# Altium PCB PCB1.PcbDoc
Units mil, origin at the board's own origin, x right, y up, seen from the top; angles counter-clockwise.
Board outline 3225 x 4005 mil, 2 copper layers (Top Layer, Bottom Layer); 19 components, 28 nets, 145 pads, 2 vias.
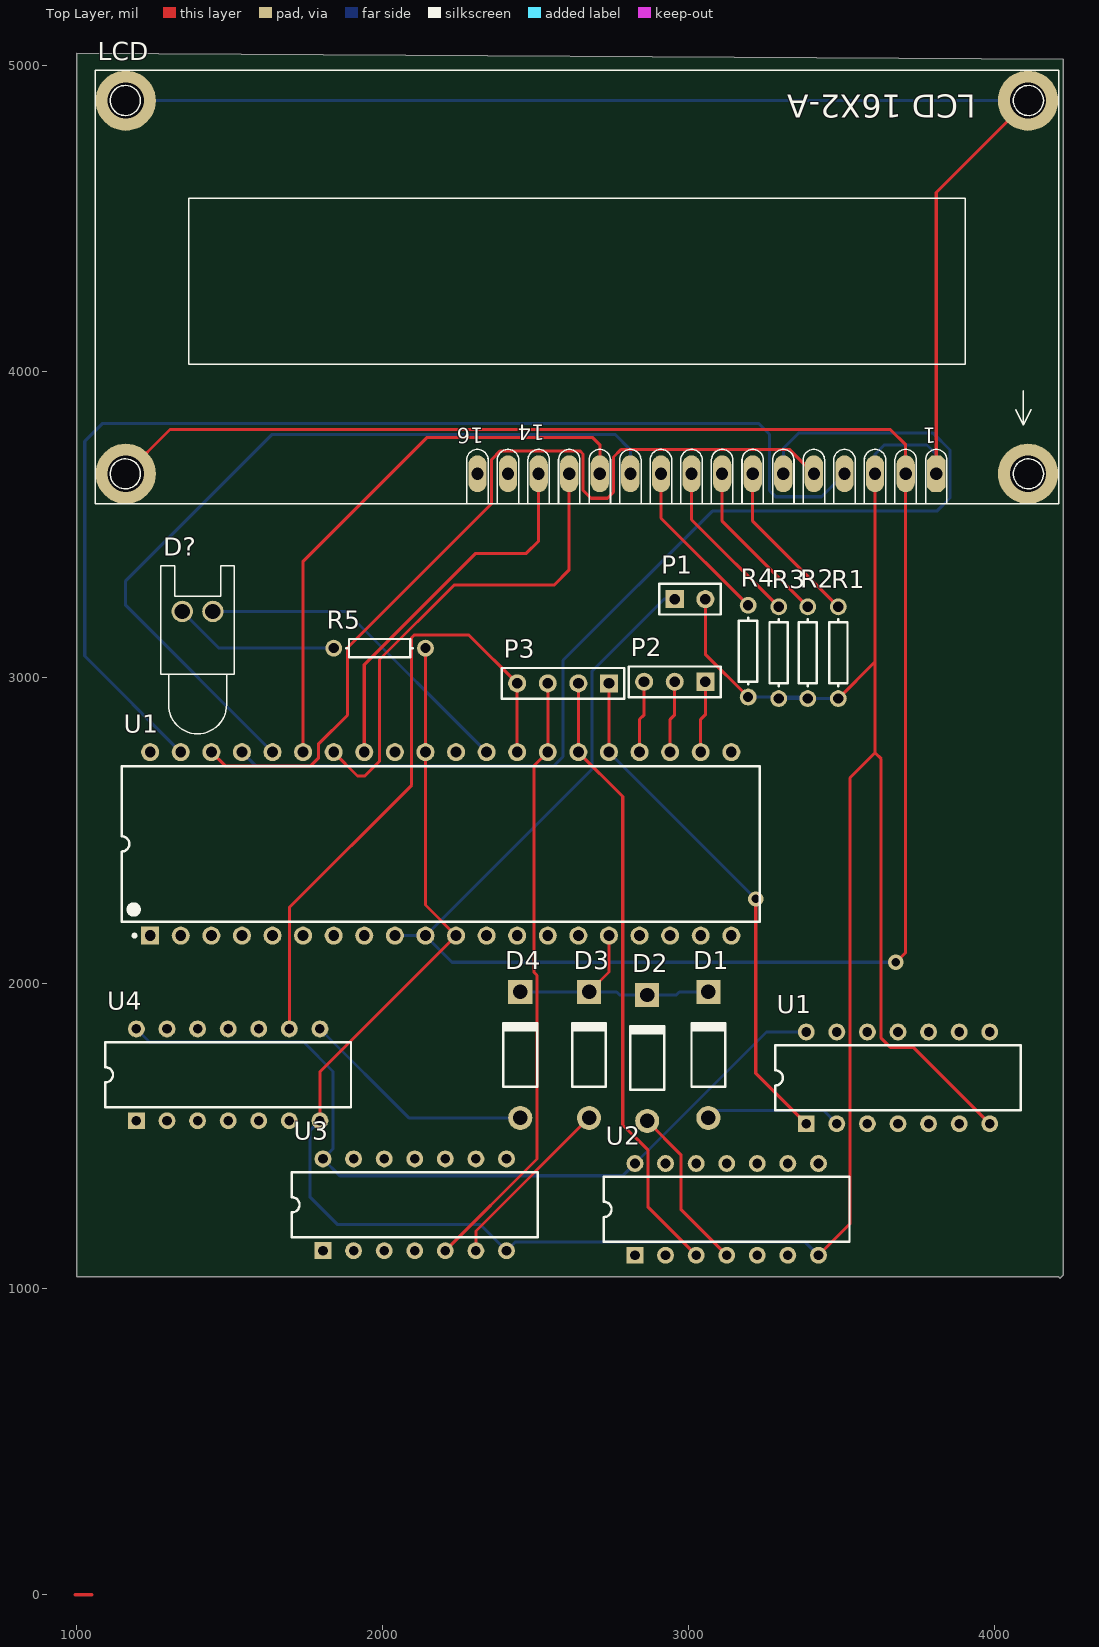
[diagram p0: Top Layer view]
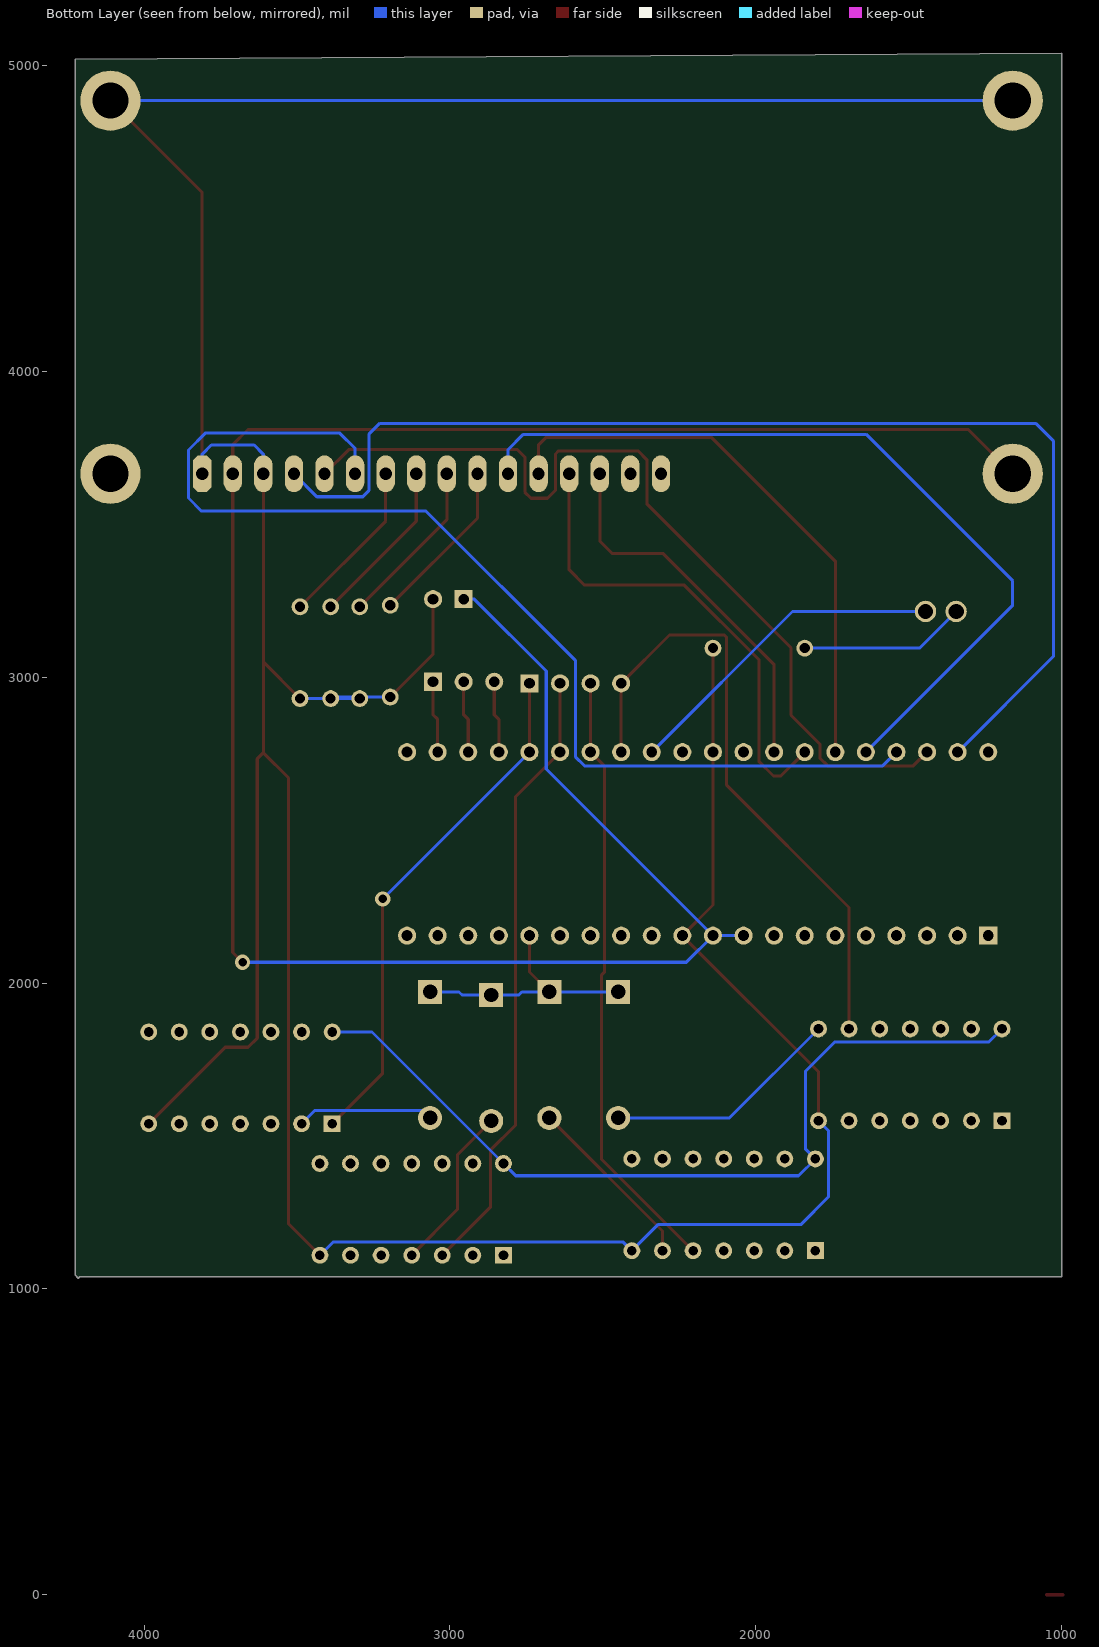
[diagram p1: Bottom Layer view, seen from below]

## Layer stack, top to bottom
Top Solder: solder mask 0.4, Solder Resist, Dk 3.5
Top Layer: signal copper 1.4
Dielectric 1: dielectric 12.6, FR-4, Dk 4.8
Bottom Layer: signal copper 1.4
Bottom Solder: solder mask 0.4, Solder Resist, Dk 3.5

## Board outline
4225,5020 4225,1045 4215,1035 4210,1040 1000,1040 1000,5040

## Design rules (kind name [scope] priority, off if disabled: settings)
Clearance [All] p1: gap=10 ignorepadtopadclearanceinfootprint=FALSE except(0: Arc-Hole Track-Hole SMDPad-Hole THPad-Hole Via-Hole Fill-Hole Poly-Hole Region-Hole Text-Hole)
PolygonConnect [All] p1: connectstyle=Relief reliefconductorwidth=10 reliefentries=4 polygonreliefangle="90 Angle" airgapwidth=10
RoomDefinition Sheet1 [InComponentClass('Sheet1')] p1: confinementstyle=ConfineIn formatcopy=TRUE lockcomponents=FALSE outline 995,1020 4230,1020 4230,5020 995,5020
RoutingVias [All] p1: holewidth=28 width=50 viastyle="Through Hole" minholewidth=28 minwidth=50 maxholewidth=28 maxwidth=50
SolderMaskExpansion [All] p1: expansion=4
Width [All] p1: maxlimit=10 minlimit=10 preferedwidth=10
30 further rules are at their usual default settings.

## Components (designator, comment, footprint, x,y, rotation, side; value= is the part's Value field where it differs from the comment)
D1 "Diode 1N4007" DO-41 3065,1765 r90 top
D2 "Diode 1N4007" DO-41 2865,1755 r90 top
D3 "Diode 1N4007" DO-41 2675,1765 r90 top
D4 "Diode 1N4007" DO-41 2450,1765 r90 top
D? "LED0" LED-0 1395,3215 r0 top
LCD "LCD 16X2" "My_LCD 16x2-A" 3810,3665 r180 top
P1 "Header 2" HDR1X2 2955,3255 r0 top
P2 "Header 3" HDR1X3 3055,2985 r180 top
P3 "Header 4" HDR1X4 2740,2980 r180 top
R1 "Res1" AXIAL-0.3 3490,3080 r90 top value=10k
R2 "Res1" AXIAL-0.3 3390,3080 r90 top value=10k
R3 "Res1" AXIAL-0.3 3295,3080 r90 top value=10k
R4 "Res1" AXIAL-0.3 3195,3085 r90 top value=10k
R5 "Res1" AXIAL-0.3 1990,3095 r0 top value=500
U1 "MC54HC04AJ" 632-08 3685,1690 r0 top
U1 "ATmega16-16PC" 40P6 2190,2455 r90 top
U2 "MC54HC04AJ" 632-08 3125,1260 r0 top
U3 "MC54HC04AJ" 632-08 2105,1275 r0 top
U4 "MC54HC04AJ" 632-08 1495,1700 r0 top

## Footprints (in the part's own frame and the unit in brackets; to place one, negate y for a bottom-side part, rotate by r counter-clockwise, add the part's x,y. Pads: shape width x height; smd on the part's side, far side on the other; paste and mask are expansions set on the pad)
40P6 [mm] "DIP, 40-Leads, Row Spacing 15.24mm, Pitch 2.54mm, Body 52.2x13.95mm"
  rect 1.5x1.5 hole 0.9: 1(-7.62,24.13)
  round 1.5 hole 0.9: 2(-7.62,21.59) 3(-7.62,19.05) 4(-7.62,16.51) 5(-7.62,13.97) 6(-7.62,11.43) 7(-7.62,8.89) 8(-7.62,6.35) 9(-7.62,3.81) 10(-7.62,1.27) 11(-7.62,-1.27) 12(-7.62,-3.81) 13(-7.62,-6.35) 14(-7.62,-8.89) 15(-7.62,-11.43) 16(-7.62,-13.97) 17(-7.62,-16.51) 18(-7.62,-19.05) 19(-7.62,-21.59) 20(-7.62,-24.13) 21(7.62,-24.13) 22(7.62,-21.59) 23(7.62,-19.05) 24(7.62,-16.51) 25(7.62,-13.97) 26(7.62,-11.43) 27(7.62,-8.89) 28(7.62,-6.35) 29(7.62,-3.81) 30(7.62,-1.27) 31(7.62,1.27) 32(7.62,3.81) 33(7.62,6.35) 34(7.62,8.89) 35(7.62,11.43) 36(7.62,13.97) 37(7.62,16.51) 38(7.62,19.05) 39(7.62,21.59) 40(7.62,24.13)
  silkscreen extent -7.74,-26.5 6.45,26.5, body extent -7.05,-26.47 7.05,26.47, height 4.83
632-08 [mm] "DIP; 14 Leads; Row Spacing 7.62 mm; Pitch 2.54 mm"
  rect 1.4x1.4 hole 0.8: 1(-7.62,-3.81)
  round 1.4 hole 0.8: 2(-5.08,-3.81) 3(-2.54,-3.81) 4(0,-3.81) 5(2.54,-3.81) 6(5.08,-3.81) 7(7.62,-3.81) 8(7.62,3.81) 9(5.08,3.81) 10(2.54,3.81) 11(0,3.81) 12(-2.54,3.81) 13(-5.08,3.81) 14(-7.62,3.81)
  silkscreen extent -10.2,-2.7 10.2,2.7
AXIAL-0.3 [mm] "Axial Device, Thru-Hole; 2 Leads; 0.3 in Pin Spacing"
  round 1.4 hole 0.85: 1(-3.81,0) 2(3.81,0)
  silkscreen extent -2.77,-0.76 2.77,0.76
DO-41 [mm] "Diode, Axial; Body 5.2 x 2.7 mm (LxDia. max), Lead Dia. 0.86 mm (max)"
  round 2 hole 1.2: 1(-5.23,0)
  rect 2x2 hole 1.2: 2(5.23,0)
  silkscreen extent -2.65,-1.4 2.75,1.4
HDR1X2 [mm] "Connector; Header; 2 Position"
  rect 1.5x1.5 hole 0.9: 1(0,0)
  round 1.5 hole 0.9: 2(2.54,0)
  silkscreen extent -1.27,-1.27 3.81,1.27
HDR1X3 [mm] "Connector; Header; 3 Position"
  rect 1.5x1.5 hole 0.9: 1(0,0)
  round 1.5 hole 0.9: 2(2.54,0) 3(5.08,0)
  silkscreen extent -1.27,-1.27 6.35,1.27
HDR1X4 [mm] "Connector; Header; 4 Position"
  rect 1.5x1.5 hole 0.9: 1(0,0)
  round 1.5 hole 0.9: 2(2.54,0) 3(5.08,0) 4(7.62,0)
  silkscreen extent -1.27,-1.27 8.89,1.27
LED-0 [mil] "LED; 2 Leads"
  round 70 hole 50: 1(50,0) 2(-50,0)
  silkscreen extent -120,-400 120,150
"My_LCD 16x2-A" [mil]
  round 196.85 hole 118.11: 0(-300,0) 1(-300,-1220) 2(2650,0) 3(2650,-1220)
  oct 60x120 hole 40: 1(0,0)
  oval 60x120 hole 40: 2(100,0) 3(200,0) 4(300,0) 5(400,0) 6(500,0) 7(600,0) 8(700,0) 9(800,0) 10(900,0) 11(1000,0) 12(1100,0) 13(1200,0) 14(1300,0) 15(1400,0) 16(1500,0)
  silkscreen extent -400,-1319 2750,98

## Part data
D1 D2 D3 D4: "1 Amp General Purpose Rectifier", Code_JEDEC=DO-204-AL, ComponentLink1Description="Manufacturer Link", ComponentLink1URL=http://www.fairchildsemi.com/, ComponentLink2Description=Datasheet, ComponentLink2URL=http://www.fairchildsemi.com/ds/1N%2F1N4001.pdf, DatasheetVersion=1998, LatestRevisionDate=17-Jul-2002, LatestRevisionNote="Re-released for DXP Platform.", PackageDescription="Diode, Axial; Body 5.2 x 2.7 mm (LxDia. max), Lead Dia. 0.86 mm (max)", PackageReference=DO-41, PackageVersion=Aug-1999, Published=8-Jun-2000, Publisher="Altium Limited"
D?: "Typical INFRARED GaAs LED", LatestRevisionDate=08-Jul-2005, LatestRevisionNote="Mech Layer 1 removed.", PackageDescription="LED; 2 Leads", PackageReference=LED-0, Published=8-Jun-2000, Publisher="Altium Limited"
LCD: "LCD 16X2 Character lcd"
P1: "Header, 2-Pin", LatestRevisionDate=17-Jul-2002, LatestRevisionNote="Re-released for DXP Platform.", Publisher="Altium Limited"
P2: "Header, 3-Pin", LatestRevisionDate=17-Jul-2002, LatestRevisionNote="Re-released for DXP Platform.", Publisher="Altium Limited"
P3: "Header, 4-Pin", LatestRevisionDate=17-Jul-2002, LatestRevisionNote="Re-released for DXP Platform.", Publisher="Altium Limited"
R1 R2 R3 R4 R5: "Resistor", LatestRevisionDate=17-Jul-2002, LatestRevisionNote="Re-released for DXP Platform.", PackageDescription="Axial Device, Thru-Hole; 2 Leads; 0.3 in Pin Spacing", PackageReference=AXIAL-0.3, Published=8-Jun-2000, Publisher="Altium Limited"
U1 U2 U3 U4: "Hex Inverter", ComponentLink1Description="Manufacturer Link", ComponentLink1URL=http://www.onsemi.com/site/products/parametrics/0,4446,247,00.html, ComponentLink2Description="Ibis Model", ComponentLink2URL=http://www.onsemi.com/pub/Collateral/MC54HC04AJ.IBS, DatasheetVersion=1989, LatestRevisionDate=06-Jun-2005, LatestRevisionNote="Stylized 3D Model Added", PackageDescription="DIP; 14 Leads; Row Spacing 7.62 mm; Pitch 2.54 mm", PackageReference=632-08, Published=17-Jul-2002, Publisher="Altium Limited"
U1: "8-Bit AVR Microcontroller with 16K Bytes of In-System Programmable Flash Memory", Supplier Part Number 1=ATMEGA16-16PC-ND, Code_JEDEC=MS-011-AC, ComponentLink1Description=Datasheet, ComponentLink1URL=http://www.atmel.com/dyn/resources/prod_documents/doc2466.pdf, ComponentLink2Description="Atmel.com Home", ComponentLink2URL=http://www.atmel.com, DatasheetVersion=2466E-AVR-10/02, PackageDescription="40-lead (0.600\"/15.24mm Wide) Plastic Dual Inline Package (PDIP)", PackageReference=40P6, PackageVersion="revB, Sep-2001", Published=17-Sep-2003, Publisher="Altium Limited", Supplier 1=Digi-Key, Supplier 2=Mouser, Supplier Part Number 2=556-ATMEGA16-16PC

## Via types
v1: diameter 50, hole 28, Top Layer to Bottom Layer, 2 vias

## Nets (pads, with @x,y where several pads share a name; then routed paths per layer and width w, separated by ;. In a path a pad name is that pad's centre, name@x,y a point inside that pad or via, vN(x,y) a via of type N, cw(c..) or ccw(c..) an arc to the next point about the centre after c; other vN are vias at no path point)
GND: LCD.1 LCD.3 P1.2 R1.1 R2.1 R3.1 R4.1 R5.2 U1.7@3985,1540 U1.11@2240,2155 U1.31 U2.7 U3.7 U4.7 | length 13429.5
  Top Layer w10: U4.7 1795,1710 2240,2155 2140,2255 U1.31 R5.2 ; P1.2 3055,3075 R4.1 ; U2.7 3528,1213 3528,2671 3610,2753 ; R1.1 3610,3050 ; LCD.3@3610,3665 3610,3050 ; LCD.1@3810,3665 3810,4585 LCD.1@4110,4885 ; U1.7@3985,1540 3735,1790 3660,1790 3630,1820 3630,2733 3610,2753 ; 3610,2753 3610,3050
  Bottom Layer w10: LCD.3@1160,4885 LCD.1@4110,4885 ; U4.7 1762,1517 1762,1301 1853,1210 2320,1210 U3.7 2433,1153 3382,1153 U2.7 ; R4.1 3385,2935 R2.1 ; R3.1 R2.1 ; R1.1 R2.1 ; LCD.3@3610,3665 3610,3729 3640,3759 3780,3759 3810,3729 LCD.1@3810,3665
NetD1_1: D1.1 U1.2@3485,1540 | length 461.7
  Bottom Layer w10: D1.1 3065,1583 3442,1583 U1.2@3485,1540
NetD1_2: D1.2 D2.2 D3.2 D4.2 U1.16 | length 834.3
  Top Layer w10: D3.2 2740,2035.91 U1.16
  Bottom Layer w10: D4.2 D3.2 2765,1970.91 2775,1960.91 D2.2 2960,1960.91 2970,1970.91 D1.2
NetD2_1: D2.1 U2.4 | length 546.8
  Top Layer w10: D2.1 2975,1439.09 2975,1260 U2.4
NetD3_1: D3.1 U3.6 | length 587.4
  Top Layer w10: U3.6 2305,1189.09 D3.1
NetD4_1: D4.1 U4.8 | length 775.5
  Bottom Layer w10: U4.8 2085.91,1559.09 D4.1
NetD?_1: D?.1 U1.29 | length 1085.5
  Bottom Layer w10: D?.1 1880,3215 U1.29
NetD?_2: D?.2 R5.1 | length 544.7
  Bottom Layer w10: D?.2 1465,3095 R5.1
NetLCD_4: LCD.4 U1.39 | length 3892.8
  Bottom Layer w10: U1.39 1026,3069 1026,3771 1085,3830 3229,3830 3265,3794 3265,3610 3285,3590 3435,3590 LCD.4
NetLCD_5: LCD.5 U1.38 | length 2955.3
  Top Layer w10: U1.38 1485,2710 1765,2710 1790,2735 1790,2781 1885,2876 1885,3096 2356,3567 2356,3711 2385,3740 2645,3740 2655,3730 2655,3611 2681,3585 2735,3585 2755,3605 2755,3720 2779,3744 3331,3744 LCD.5
NetLCD_6: LCD.6 U1.37 | length 3709.5
  Bottom Layer w10: U1.37 1585,2710 2560,2710 2590,2740 2590,3055 3078,3543 3812,3543 3855,3586 3855,3743 3800,3798 3360,3798 3310,3748 LCD.6
NetLCD_7: LCD.7 R1.2 | length 551
  Top Layer w10: LCD.7 3210,3510 R1.2
NetLCD_8: LCD.8 R2.2 | length 551
  Top Layer w10: LCD.8 3110,3510 R2.2
NetLCD_9: LCD.9 R3.2 | length 553.1
  Top Layer w10: LCD.9 3010,3515 R3.2
NetLCD_10: LCD.10 R4.2 | length 548.1
  Top Layer w10: LCD.10 2910,3520 R4.2
NetLCD_11: LCD.11 U1.36 | length 2706.9
  Bottom Layer w10: U1.36 1160,3235 1160,3315 1639,3794 2760,3794 2810,3744 LCD.11
NetLCD_12: LCD.12 U1.35 | length 1865.9
  Top Layer w10: U1.35 1740,3379 2144,3783 2687,3783 2710,3760 LCD.12
NetLCD_13: LCD.13 U1.34 | length 1590.3
  Top Layer w10: U1.34 1918,2677 1942,2677 1990,2725 1990,3057.56 2233.44,3301 2560,3301 2610,3351 LCD.13
NetLCD_14: LCD.14 U1.33 | length 1243.3
  Top Layer w10: U1.33 1940,3041 2304,3405 2470,3405 2510,3445 LCD.14
NetP2_1: P2.1 U1.22 | length 236.2
  Top Layer w10: U1.22 3040,2862 3055,2877 P2.1
NetP2_2: P2.2 U1.23 | length 236.2
  Top Layer w10: U1.23 2940,2862 2955,2877 P2.2
NetP2_3: P2.3 U1.24 | length 236.2
  Top Layer w10: U1.24 2840,2862 2855,2877 P2.3
NetP3_1: P3.1 U1.1@3385,1540 U1.25 | length 1707.2
  Top Layer w10: U1.25 P3.1 ; v1(3220,2275) 3220,1705 U1.1@3385,1540
  Bottom Layer w10: U1.25 v1(3220,2275)
NetP3_2: P3.2 U1.26 U2.3 | length 2029.5
  Top Layer w10: P3.2 U1.26 2785,2610 2785,1536 2868,1453 2868,1267 U2.3
NetP3_3: P3.3 U1.27 U3.5 | length 2002
  Top Layer w10: U3.5 2505,1425 2505,2025 2495,2035 2495,2710 U1.27 P3.3
NetP3_4: P3.4 U1.28 U4.9 | length 2084.4
  Top Layer w10: U4.9 1695,2247 2095,2647 2095,3130 2103,3138 2282,3138 P3.4 U1.28
VCC: LCD.2 P1.1 U1.9@2040,2155 U1.10@2140,2155 | length 7468.1
  Top Layer w10: LCD.2@1160,3665 1305,3810 3660,3810 3710,3760 3710,3665 3710,2100 v1(3678,2068)
  Bottom Layer w10: U1.9@2040,2155 U1.10@2140,2155 ; P1.1 2920,3255 2685,3020 2685,2700 U1.10@2140,2155 ; v1(3678,2068) 2227,2068 U1.10@2140,2155
VDD: U1.14@3385,1840 U2.14 U3.14 U4.14 | length 2797.7
  Bottom Layer w10: U4.14 1238,1807 1742,1807 1838,1711 1838,1458 U3.14 1860,1370 2785,1370 U2.14 3255,1840 U1.14@3385,1840
pads on no net: LCD.0 LCD.15 LCD.16 U1.1@1240,2155 U1.2@1340,2155 U1.3 U1.4 U1.5 U1.6 U1.7@1840,2155 U1.8 U1.9@3885,1840 U1.10@3785,1840 U1.11@3685,1840 U1.12 U1.13 U1.14@2540,2155 U1.15 U1.17 U1.18 U1.19 U1.20 U1.21 U1.30 U1.32 U1.40 U2.1 U2.2 U2.5 U2.6 U2.8 U2.9 U2.10 U2.11 U2.12 U2.13 U3.1 U3.2 U3.3 U3.4 U3.8 U3.9 U3.10 U3.11 U3.12 U3.13 U4.1 U4.2 U4.3 U4.4 U4.5 U4.6 U4.10 U4.11 U4.12 U4.13
copper on no net: | length 55
  Top Layer w10: 995,0 1005,0 1020,0 1050,0

## Text inside footprints (layer, text, board x,y; h text height)
LCD: Top Overlay "LCD 16X2-A" at 3940,4905 h75 r180; Top Overlay "16" at 2330,3815 h50 r180; Top Overlay "1" at 3810,3815 h50 r180; Top Overlay "14" at 2530,3825 h50 r180